# EAGLE board voltage-relay-panel (EAGLE 6.2)
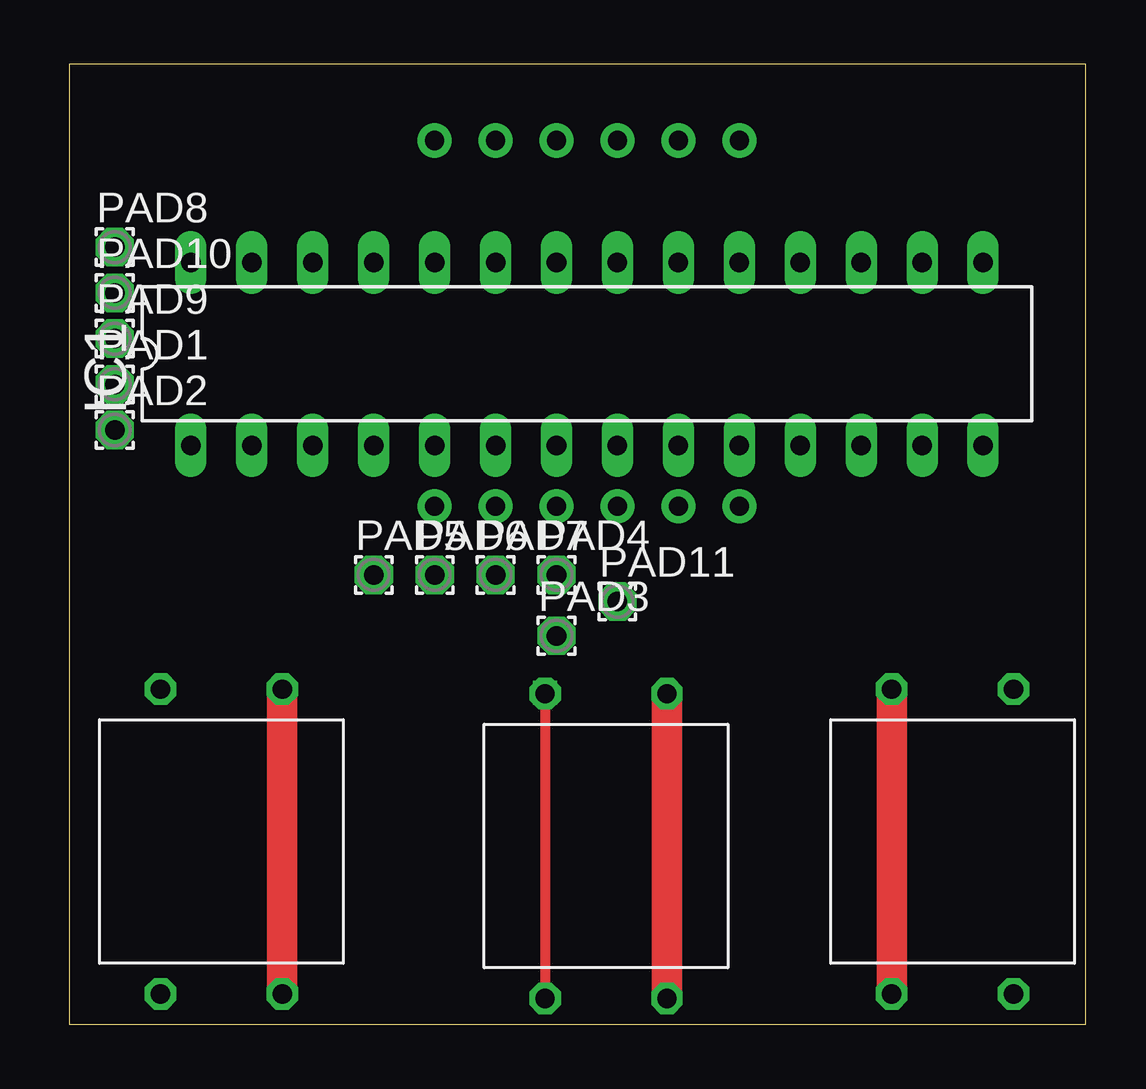
[diagram p0: board, top side]
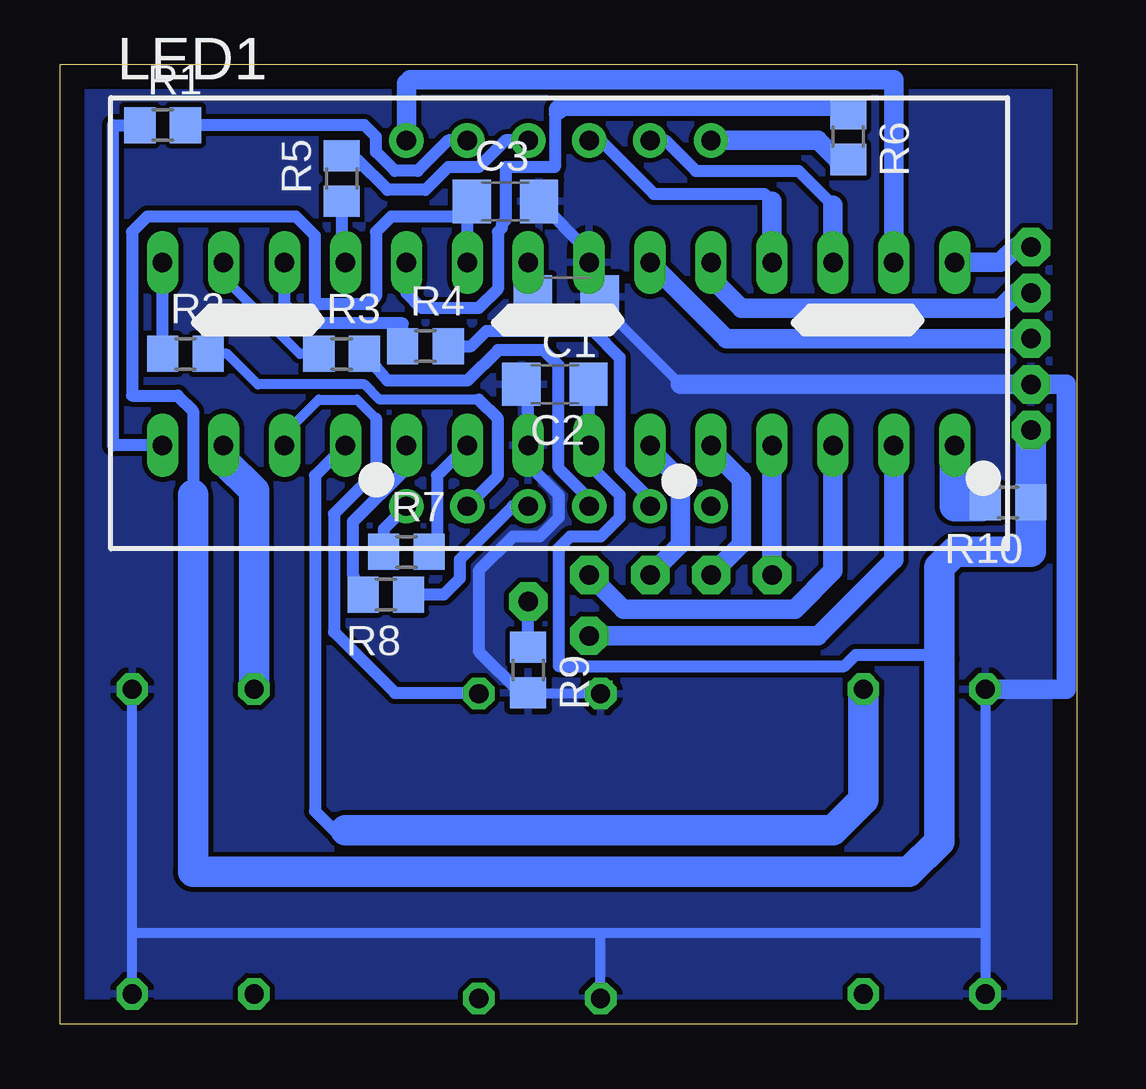
[diagram p1: board, bottom side, seen from below]

Size 42.38 x 40 mm. Coordinates in mm from the lower left corner, seen from the top.
Outline: 0,0 42.38,0 42.38,40 0,40 0,0
Copper layers (1*16): Top 0.035mm / dielectric 1.5mm / Bottom 0.035mm
Design rules: minimum track width 10mil, minimum drill 24mil, track to track 8mil, track to pad 8mil, pad to pad 8mil, via to via 8mil, smd to smd 8mil, copper to edge 40mil, drill to drill 8mil, minimum pad ring 10mil, minimum via ring 8mil, stop-mask expansion 4mil, vias tented up to drill 0mil, thermal gap 10mil

## Footprints (pad centres in the part's own frame; a part is rotated, then mirrored left to right if it is on the bottom)
C1206 = smd 1.6 x 1.8: 1 -1.4,0; 2 1.4,0
DIL28-3 = drill 0.813 long: 1 -16.51,-3.81; 2 -13.97,-3.81; 3 -11.43,-3.81; 4 -8.89,-3.81; 5 -6.35,-3.81; 6 -3.81,-3.81; 7 -1.27,-3.81; 8 1.27,-3.81; 9 3.81,-3.81; 10 6.35,-3.81; 11 8.89,-3.81; 12 11.43,-3.81; 13 13.97,-3.81; 14 16.51,-3.81; 15 16.51,3.81; 16 13.97,3.81; 17 11.43,3.81; 18 8.89,3.81; 19 6.35,3.81; 20 3.81,3.81; 21 1.27,3.81; 22 -1.27,3.81; 23 -3.81,3.81; 24 -6.35,3.81; 25 -8.89,3.81; 26 -11.43,3.81; 27 -13.97,3.81; 28 -16.51,3.81
BX56-12 = drill 0.8 pad 1.422: 1 -6.35,-7.62; 2 -3.81,-7.62; 3 -1.27,-7.62; 4 1.27,-7.62; 5 3.81,-7.62; 6 6.35,-7.62; 7 6.35,7.62; 8 3.81,7.62; 9 1.27,7.62; 10 -1.27,7.62; 11 -3.81,7.62; 12 -6.35,7.62
1,6/0,8 = drill 0.813 pad 1.6 octagon: 1 0,0
R0805 = smd 1.3 x 1.5: 1 -0.95,0; 2 0.95,0
LARGE = drill 0.8 octagon: P$1 -6.35,2.54; P$2 6.35,2.54; P$3 -6.35,-2.54; P$4 6.35,-2.54

## Placement (x,y rotation side)
C1  0.1  [C1206]  21.27,30.32 180 bottom
C2  0.1  [C1206]  21.75,26.67 180 bottom
C3  0.1  [C1206]  23.81,34.29 0 bottom
IC1  MEGA8-P  [DIL28-3]  21.59,27.94 0 top
LED1  BA56-12YWA  [BX56-12]  21.59,29.21 0 bottom
PAD1  [1,6/0,8]  1.91,26.67 0 top
PAD2  [1,6/0,8]  1.91,24.77 0 top
PAD3  [1,6/0,8]  20.32,16.19 0 top
PAD4  [1,6/0,8]  20.32,18.73 0 top
PAD5  [1,6/0,8]  12.7,18.73 0 top
PAD6  [1,6/0,8]  15.24,18.73 0 top
PAD7  [1,6/0,8]  17.78,18.73 0 top
PAD8  [1,6/0,8]  1.91,32.38 0 top
PAD9  [1,6/0,8]  1.91,28.57 0 top
PAD10  [1,6/0,8]  1.91,30.48 0 top
PAD11  [1,6/0,8]  22.86,17.62 0 top
R1  470  [R0805]  38.1,37.47 0 bottom
R2  470  [R0805]  37.15,27.94 0 bottom
R3  470  [R0805]  30.64,27.94 0 bottom
R4  470  [R0805]  27.15,28.26 0 bottom
R5  470  [R0805]  30.64,35.24 90 bottom
R6  470  [R0805]  9.53,36.99 270 bottom
R7  470  [R0805]  27.94,19.68 0 bottom
R8  470  [R0805]  28.8,17.91 180 bottom
R9  470  [R0805]  22.86,14.76 270 bottom
R10  10K  [R0805]  2.86,21.75 180 bottom
U$1  TL1105  [LARGE]  36.83,7.62 90 top
U$2  TL1105  [LARGE]  22.38,7.43 270 top
U$3  TL1105  [LARGE]  6.35,7.62 270 top

## Library data of the parts
C1-C3 R1-R10 = rcl
IC1 = atmel; OC_FARNELL: unknown; OC_NEWARK: unknown
LED1 = display-kingbright; OC_FARNELL: unknown; OC_NEWARK: unknown
PAD1-PAD11 = wirepad
U$1-U$3 = switch

## Nets
B_MINUS: IC1.13 U$1.P$1 U$1.P$2
B_MODE: IC1.11 U$3.P$1 U$3.P$2
B_PLUS: IC1.12 U$2.P$1 U$2.P$2
DISP_A: LED1.11 R1.2
DISP_B: LED1.7 R6.2
DISP_C: LED1.4 R3.2
DISP_CA1: IC1.27 LED1.12
DISP_CA2: IC1.25 LED1.9
DISP_CA3: IC1.26 LED1.8
DISP_D: LED1.2 R2.2
DISP_DP: LED1.3 R8.1
DISP_E: LED1.1 R7.1
DISP_F: LED1.10 R5.2
DISP_G: LED1.5 R4.2
GND: C1.1 C2.2 C3.2 IC1.8 IC1.22 PAD1.1 R9.2 U$1.P$3 U$1.P$4 U$2.P$3 U$2.P$4 U$3.P$3 U$3.P$4
GPIO0: IC1.4 PAD5.1
GPIO1: IC1.5 PAD6.1
GPIO2: IC1.6 PAD7.1
GPIO3: IC1.23 PAD9.1
GPIO4: IC1.24 PAD10.1
GPIO5: IC1.28 PAD8.1
LED_G: IC1.3 PAD4.1
LED_R: IC1.2 PAD3.1
N$1: IC1.1 R10.2
N$2: PAD11.1 R9.1
N$4: IC1.14 R1.1
N$5: IC1.15 R2.1
N$6: IC1.16 R3.1
N$7: IC1.17 R4.1
N$8: IC1.18 R5.1
N$9: IC1.19 R6.1
N$10: IC1.9 R7.2
N$11: IC1.10 R8.2
N$12: C1.2 IC1.21
VCC: C2.1 C3.1 IC1.7 IC1.20 PAD2.1 R10.1

## Tracks (layer width: path | path; a pad name or v marks a point on that pad's centre or on a via)
B_MINUS
  Top 1.27: U$1.P$2 U$1.P$1
  Bottom 1.27: U$1.P$2 34.29,22.23 35.56,23.5 IC1.13
B_MODE
  Top 1.27: U$3.P$2 U$3.P$1
  Bottom 0.508: IC1.11 31.75,22.86 31.75,8.89 30.96,8.1 30.48,8.1
  Bottom 1.27: U$3.P$1 8.89,9.37 10.16,8.1 30.48,8.1
B_PLUS
  Top 1.27: U$2.P$1 U$2.P$2
  Bottom 0.406: IC1.12 33.02,24.61 31.59,26.04 30,26.04 29.21,25.24
  Bottom 0.508: 29.21,25.24 29.21,23.02 30.96,21.27 30.96,16.35 28.42,13.81 24.96,13.81 U$2.P$1
DISP_A
  Bottom 0.508: LED1.11 26.19,36.83 27.46,35.56 28.42,35.56 29.21,36.35 29.21,36.99 29.69,37.47 R1.2
DISP_B
  Bottom 0.813: LED1.7 10.79,36.83 10,36.04 R6.2
DISP_C
  Bottom 0.508: R3.2 28.74,26.83 25.4,26.83 24.13,28.1 22.23,28.1 21.59,27.46 21.59,23.18 20.32,21.91 LED1.4
DISP_CA1
  Bottom 0.813: IC1.27 7.62,39.37 27.78,39.37 27.94,39.21 LED1.12
DISP_CA2
  Bottom 0.508: LED1.9 19.84,36.83 17.62,34.61 13.02,34.61 12.7,34.29
  Bottom 0.813: 12.7,34.29 IC1.25
DISP_CA3
  Bottom 0.508: LED1.8 17.14,36.83 15.88,35.56 11.59,35.56 10.16,34.13
  Bottom 0.813: 10.16,34.13 IC1.26
DISP_D
  Bottom 0.406: 24.92,26.04 29.05,26.04 29.69,26.67 34.13,26.67 35.4,27.94 R2.2
  Bottom 0.508: LED1.2 24.13,22.86 24.13,25.24 24.92,26.04
DISP_DP
  Bottom 0.508: LED1.3 23.5,21.59 25.72,19.37 25.72,18.57 26.38,17.91 R8.1
DISP_E
  Bottom 0.508: LED1.1 28.89,20.64 R7.1
DISP_F
  Bottom 0.508: LED1.10 23.81,36.83 24.92,35.72 26.19,35.72 27.15,34.77 28.73,34.77 30,36.04 30.48,36.04 R5.2
DISP_G
  Bottom 0.508: R4.2 25.24,28.26 24.61,28.89 20.16,28.89 19.05,27.78 19.05,23.18 17.78,21.91 LED1.5
GND  (via drill 0.6)
  Top 0.406: v19.84,13.81 U$2.P$4
  Bottom 0.406: C1.1 19.87,30.03 16.51,26.67 | U$3.P$3 3.81,3.81 | 3.81,3.81 U$3.P$4 | U$1.P$3 39.37,3.81 | 39.37,3.81 19.68,3.81 | 19.68,3.81 3.81,3.81 | 39.37,3.81 U$1.P$4 | U$2.P$4 19.84,3.65 19.68,3.81 | U$2.P$3 22.83,13.78 R9.2
  Bottom 0.508: C2.2 22.86,26.38 IC1.8 22.86,23.34 21.59,22.07 21.59,21.11 22.38,20.32 23.5,20.32 24.92,18.89 24.92,15.56 23.18,13.81 R9.2 | C3.2 20.32,32.2 IC1.22 20.32,30.77 C1.1 | U$2.P$3 v19.84,13.81
  Bottom 0.813: 16.51,26.67 PAD1.1 0.43,26.67 0.43,13.97 U$3.P$3
  pour Bottom: 0,0 42.39,0 42.39,40.01 0,40.01
GPIO0
  Bottom 0.813: PAD5.1 IC1.4
GPIO1
  Bottom 0.508: 15.24,23.97 IC1.5
  Bottom 0.813: PAD6.1 13.97,20 13.97,22.7 15.24,23.97
GPIO2
  Bottom 0.508: 17.78,23.97 IC1.6
  Bottom 0.813: PAD7.1 16.51,20 16.51,22.7 17.78,23.97
GPIO3
  Bottom 0.813: IC1.23 14.61,28.57 PAD9.1
GPIO4
  Bottom 0.813: IC1.24 15.24,31.11 13.97,29.84 3.17,29.84 2.54,30.48 PAD10.1
GPIO5
  Bottom 0.813: IC1.28 3.17,31.75 2.54,32.38 PAD8.1
LED_G
  Bottom 0.813: PAD4.1 18.89,17.3 11.75,17.3 10.16,18.89 IC1.3
LED_R
  Bottom 0.813: PAD3.1 10.79,16.19 7.62,19.37 IC1.2
N$1
  Bottom 1.27: R10.2 3.97,21.59 5.08,21.59 IC1.1
N$2
  Bottom 0.508: R9.1 PAD11.1
N$4
  Bottom 0.508: 39.37,37.15 R1.1 40.16,37.47 40.16,24.13 IC1.14
N$5
  Bottom 0.508: R2.1 38.1,29.53 IC1.15
N$6
  Bottom 0.406: R3.1 32.38,27.94 35.56,31.11 IC1.16
N$7
  Bottom 0.508: R4.1 28.1,29.21 32.23,29.21 33.02,30 IC1.17
N$8
  Bottom 0.508: R5.1 30.64,31.91 IC1.18
N$9
  Bottom 0.508: 21.59,38.1 21.75,37.94 21.75,35.72 23.81,35.72 23.81,33.5 23.97,33.34 23.97,33.18 24.13,33.02 24.13,30.64 24.92,29.84 27.3,29.84 27.94,30.48 IC1.19
  Bottom 0.813: 21.59,38.1 21.43,38.26 9.85,38.26 arc90 R6.1
N$10
  Bottom 0.508: IC1.9 26.67,22.86 26.67,20 R7.2
N$11
  Bottom 0.508: IC1.10 27.94,23.18 30.16,20.95 30.16,18.73 29.97,17.91 R8.2
N$12
  Bottom 0.508: C1.2 22.67,31.56 IC1.21
VCC
  Bottom 0.508: C2.1 20.32,26.64 IC1.7 20.32,23.34 19.05,22.07 19.05,21.11 19.84,20.32 21.11,20.32 21.59,19.84 21.59,14.92 9.68,14.92 9.21,15.4 6.13,15.4 5.71,15.24 | 25.4,33.66 25.4,34.1 C3.1 | IC1.20 25.4,33.66 | 25.4,33.66 28.57,33.66 29.21,33.02 29.21,30.32 29.53,30 31.59,30 31.75,30.16 31.75,32.86 32.54,33.66 38.73,33.66 39.37,33.02 39.37,26.19 37.47,26.19 36.83,25.56 36.83,22.07
  Bottom 1.27: 36.83,22.07 36.83,6.35 6.99,6.35 5.71,7.62 5.71,15.24 5.71,19.05 5.08,19.68 1.91,19.68 1.91,19.69 R10.1 PAD2.1